# EAGLE board snarfbasev4b (EAGLE 6.4)
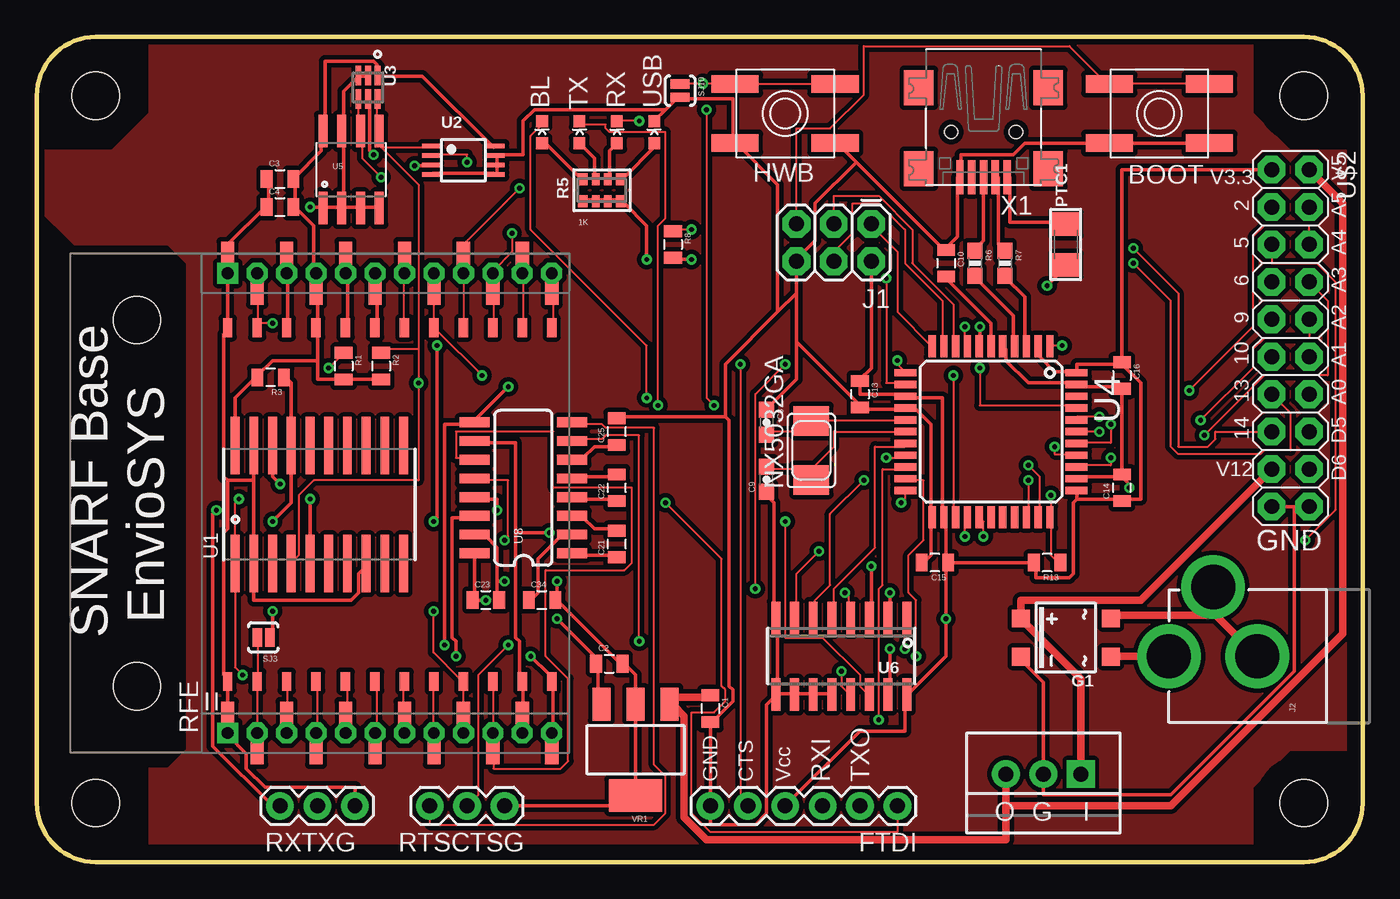
[diagram p0: board, top side]
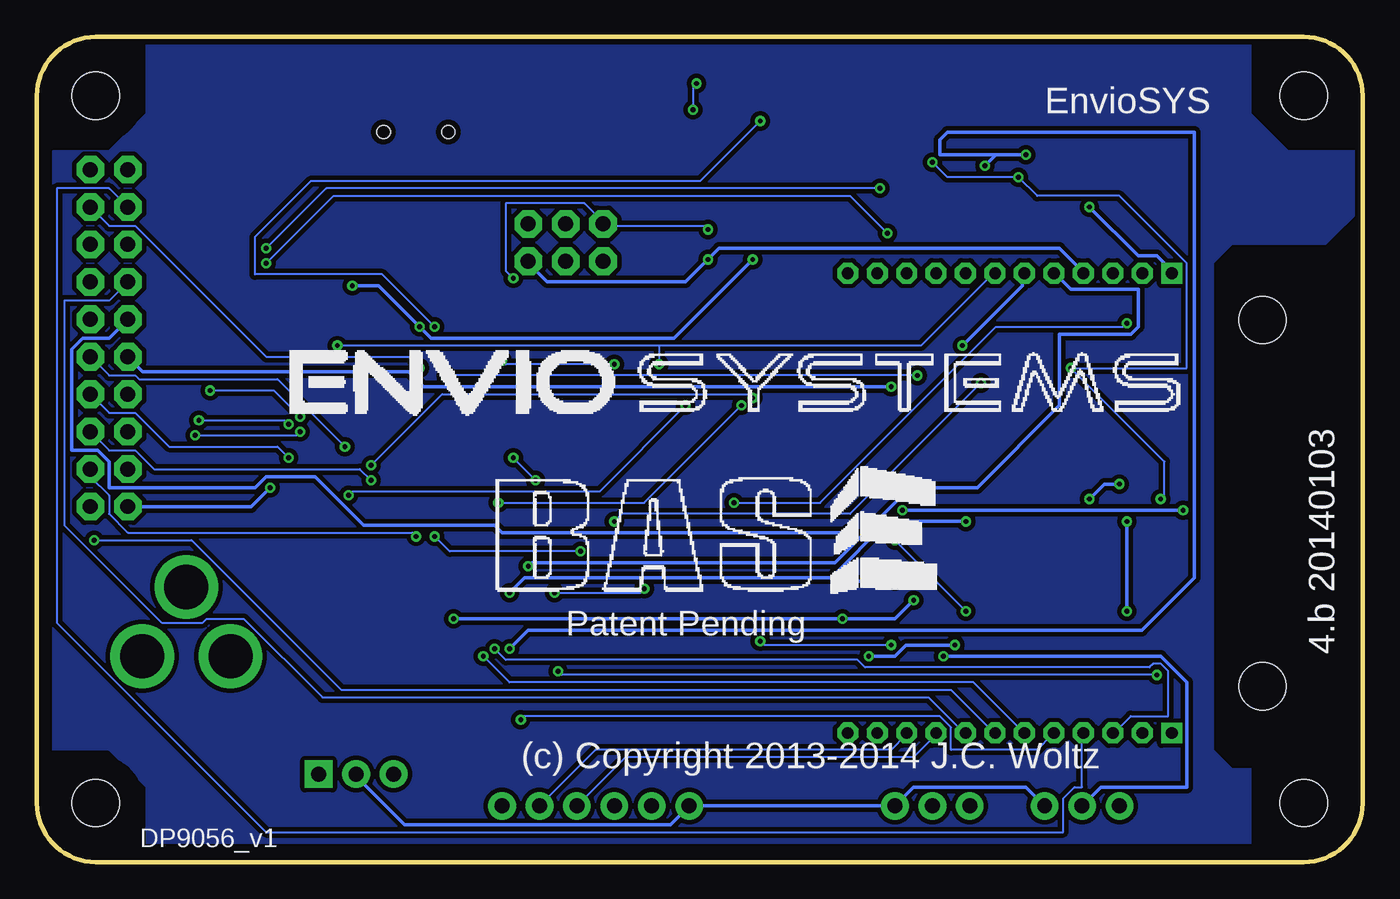
[diagram p1: board, bottom side, seen from below]

Size 90 x 56 mm. Coordinates in mm from the lower left corner, seen from the top.
Outline: 4,0 86,0 arc90 90,4 90,52 arc90 86,56 4,56 arc90 0,52 0,4 arc90 4,0
Copper layers (1*16): Top 0.0356mm / dielectric 1.5011mm / Bottom 0.0356mm
Design rules "LaenPCBOrder-JCModified": minimum track width 6mil, minimum drill 13mil, track to track 6mil, track to pad 6mil, pad to pad 6mil, via to via 6mil, smd to smd 6mil, copper to edge 15mil, drill to drill 6mil, minimum pad ring 12mil, minimum via ring 7mil, stop-mask expansion 4mil, vias tented up to drill 25mil, thermal gap 10mil
Net classes: 0 default: width 0.254 mm; 1 smallsignal: width 0.152 mm; 2 Power: width 0.508 mm; 3 medsignal: width 0.203 mm

## Footprints (pad centres in the part's own frame; a part is rotated, then mirrored left to right if it is on the bottom)
LED-0603 = smd 0.8 x 0.8: A 0,-0.75; C 0,0.75
EVQ-Q2 = smd 3.2 x 1.2: A -3.4,-2; A' 3.4,-2; B -3.4,2; B' 3.4,2
0805 = smd 0.8 x 1.2: 1 -0.9,0; 2 0.9,0
0603-CAP = smd 1.1 x 1: 1 -0.85,0; 2 0.85,0
1X06 = drill 1.016 pad 1.88: 1 0,0; 2 2.54,0; 3 5.08,0; 4 7.62,0; 5 10.16,0; 6 12.7,0
SOIC-4 = smd 1.2 x 1.2: + 1.3,3.05; - -1.3,3.05; ~1 -1.3,-3.05; ~2 1.3,-3.05
TO220-MURATA = drill 1 pad 1.88: GND 0,0; OUT 2.54,0 | drill 1 pad 1.88 square: IN -2.54,0
2X3 = drill 1.016 pad 1.88 octagon: 1 0,0; 2 0,2.54; 3 2.54,0; 4 2.54,2.54; 5 5.08,0; 6 5.08,2.54
POWER_JACK_PTH = drill 2.997 pad 4.318: GND 0,7.7; GNDBREAK 4.7,10.7; PWR 0,13.7
NX5032 = smd 2 x 2.4: P$1 2,0; P$2 -2,0
1206 = smd 1.6 x 1.8: 1 -1.4,0; 2 1.4,0
RESPACK_4X0603 = smd 0.65 x 0.8: 1 -1.3,-0.75; 4 1.3,-0.75; 5 1.3,0.75; 8 -1.3,0.75 | smd 0.5 x 0.8: 2 -0.4,-0.75; 3 0.4,-0.75; 6 0.4,0.75; 7 -0.4,0.75
0603-RES = smd 1.1 x 1: 1 -0.85,0; 2 0.85,0
SYNAPSERFENGINE-THM-SMT-JACK2 = drill 0.8 square: 1 0,0; 24 31.2,0 | drill 0.8 pad 1.422 octagon: 2 0,-2; 3 0,-4; 4 0,-6; 5 0,-8; 6 0,-10; 7 0,-12; 8 0,-14; 9 0,-16; 10 0,-18; 11 0,-20; 12 0,-22; 13 31.2,-22; 14 31.2,-20; 15 31.2,-18; 16 31.2,-16; 17 31.2,-14; 18 31.2,-12; 19 31.2,-10; 20 31.2,-8; 21 31.2,-6; 22 31.2,-4; 23 31.2,-2 | smd 1.67 x 0.89: P1 1.3,0; P2 -1.3,-2; P3 1.3,-4; P4 -1.3,-6; P5 1.3,-8; P6 -1.3,-10; P7 1.3,-12; P8 -1.3,-14; P9 1.3,-16; P10 -1.3,-18; P11 1.3,-20; P12 -1.3,-22; P13 29.9,-22; P14 32.5,-20; P15 29.9,-18; P16 32.5,-16; P17 29.9,-14; P18 32.5,-12; P19 29.9,-10; P20 32.5,-8; P21 29.9,-6; P22 32.5,-4; P23 29.9,-2; P24 32.5,0 | smd 1.27 x 0.635: P201 3.5,0; P202 3.5,-2; P203 3.5,-4; P204 3.5,-6; P205 3.5,-8; P206 3.5,-10; P207 3.5,-12; P208 3.5,-14; P209 3.5,-16; P210 3.5,-18; P211 3.5,-20; P212 3.5,-22; P213 27.5,-22; P214 27.5,-20; P215 27.5,-18; P216 27.5,-16; P217 27.5,-14; P218 27.5,-12; P219 27.5,-10; P220 27.5,-8; P221 27.5,-6; P222 27.5,-4; P223 27.5,-2; P224 27.5,0 | hole 3.2: 3.17,6.16; 28.03,6.16
1X03 = drill 1.016 pad 1.88: 1 0,0; 2 2.54,0; 3 5.08,0
SJ_2S-NOTRACE = smd 0.635 x 1.27: 1 -0.45,0; 2 0.4,0
SJ_2S-NO = smd 0.635 x 1.27: 1 -0.45,0; 2 0.45,0
SO20W = smd 0.6 x 3.9: P$1 -5.715,-4; P$2 -4.445,-4; P$3 -3.175,-4; P$4 -1.905,-4; P$5 -0.635,-4; P$6 0.635,-4; P$7 1.905,-4; P$8 3.175,-4; P$9 4.445,-4; P$10 5.715,-4; P$11 5.715,4; P$12 4.445,4; P$13 3.175,4; P$14 1.905,4; P$15 0.635,4; P$16 -0.635,4; P$17 -1.905,4; P$18 -3.175,4; P$19 -4.445,4; P$20 -5.715,4
TSSOP8 = smd 1.2 x 0.305: 1 -2.2,0.975; 2 -2.2,0.325; 3 -2.2,-0.325; 4 -2.2,-0.975; 5 2.2,-0.975; 6 2.2,-0.325; 7 2.2,0.325; 8 2.2,0.975
TSL2561_FN = smd 1.3 x 0.4: ADR -0.8,0; CLK 0.8,-0.65; DATA 0.8,0.65; INT 0.8,0; VDD -0.8,0.65; VSS -0.8,-0.65
TQFP44 = smd 1.5 x 0.5: 1 -5.8,4; 2 -5.8,3.2; 3 -5.8,2.4; 4 -5.8,1.6; 5 -5.8,0.8; 6 -5.8,0; 7 -5.8,-0.8; 8 -5.8,-1.6; 9 -5.8,-2.4; 10 -5.8,-3.2; 11 -5.8,-4; 23 5.8,-4; 24 5.8,-3.2; 25 5.8,-2.4; 26 5.8,-1.6; 27 5.8,-0.8; 28 5.8,0; 29 5.8,0.8; 30 5.8,1.6; 31 5.8,2.4; 32 5.8,3.2; 33 5.8,4 | smd 0.5 x 1.5: 12 -4,-5.8; 13 -3.2,-5.8; 14 -2.4,-5.8; 15 -1.6,-5.8; 16 -0.8,-5.8; 17 0,-5.8; 18 0.8,-5.8; 19 1.6,-5.8; 20 2.4,-5.8; 21 3.2,-5.8; 22 4,-5.8; 34 4,5.8; 35 3.2,5.8; 36 2.4,5.8; 37 1.6,5.8; 38 0.8,5.8; 39 0,5.8; 40 -0.8,5.8; 41 -1.6,5.8; 42 -2.4,5.8; 43 -3.2,5.8; 44 -4,5.8
SO08 = smd 0.61 x 2.21: 1 -1.905,-2.616; 2 -0.635,-2.616; 3 0.635,-2.616; 4 1.905,-2.616; 5 1.905,2.616; 6 0.635,2.616; 7 -0.635,2.616; 8 -1.905,2.616
SOIC16 = smd 0.6 x 2.2: 1 -4.445,-2.6; 2 -3.175,-2.6; 3 -1.905,-2.6; 4 -0.635,-2.6; 5 0.635,-2.6; 6 1.905,-2.6; 7 3.175,-2.6; 8 4.445,-2.6; 9 4.445,2.6; 10 3.175,2.6; 11 1.905,2.6; 12 0.635,2.6; 13 -0.635,2.6; 14 -1.905,2.6; 15 -3.175,2.6; 16 -4.445,2.6
SO016 = smd 0.66 x 2.032: 1 -4.445,-3.315; 2 -3.175,-3.315; 3 -1.905,-3.315; 4 -0.635,-3.315; 5 0.635,-3.315; 6 1.905,-3.315; 7 3.175,-3.315; 8 4.445,-3.315; 9 4.445,3.315; 10 3.175,3.315; 11 1.905,3.315; 12 0.635,3.315; 13 -0.635,3.315; 14 -1.905,3.315; 15 -3.175,3.315; 16 -4.445,3.315
2X10 = drill 1.016 pad 1.88 octagon: 1 -11.43,-1.27; 2 -11.43,1.27; 3 -8.89,-1.27; 4 -8.89,1.27; 5 -6.35,-1.27; 6 -6.35,1.27; 7 -3.81,-1.27; 8 -3.81,1.27; 9 -1.27,-1.27; 10 -1.27,1.27; 11 1.27,-1.27; 12 1.27,1.27; 13 3.81,-1.27; 14 3.81,1.27; 15 6.35,-1.27; 16 6.35,1.27; 17 8.89,-1.27; 18 8.89,1.27; 19 11.43,-1.27; 20 11.43,1.27
DP9056_V1 = hole 3.2: 4,4; 86,4; 86,52; 4,52
SOT223 = smd 1.219 x 2.235: 1 -2.311,-3.099; 2 0,-3.099; 3 2.311,-3.099 | smd 3.6 x 2.2: 4 0,3.099
USB-MINIB = smd 0.5 x 2.308: D+ 0,4.064; D- -0.8,4.064; GND 1.6,4.064; ID 0.8,4.064; VBUS -1.6,4.064 | smd 2 x 2.4: GND1 -4.4,-2; GND2 -4.4,3.5; GND3 4.4,3.5; GND4 4.4,-2 | hole 0.9: -2.2,1; 2.2,1

## Placement (x,y rotation side)
BL  RED  [LED-0603]  34.29,49.53 0 top
BOOT  EVQQ2  [EVQ-Q2]  76.2,50.8 180 top
C1  1uF  [0805]  45.72,10.41 270 top
C2  1uF  [0805]  38.86,13.46 0 top
C3  1uF  [0805]  16.51,46.35 0 top
C4  10uF  [0805]  16.51,44.45 0 top
C8  12pF  [0603-CAP]  49.53,29.84 270 top
C9  12pF  [0603-CAP]  49.53,25.97 90 top
C10  1uF  [0805]  61.72,40.64 270 top
C13  1uF  [0805]  55.88,31.75 270 top
C14  1uF  [0805]  73.66,25.4 90 top
C15  1uF  [0805]  60.96,20.32 180 top
C16  1uF  [0805]  73.66,33.02 270 top
C21  0.1uF  [0805]  39.37,21.59 90 top
C22  0.1uF  [0805]  39.37,25.4 90 top
C23  0.1uF  [0805]  30.48,17.78 0 top
C25  0.1uF  [0805]  39.37,29.21 90 top
C34  0.1uF  [0805]  34.29,17.78 0 top
FTDI  [1X06]  58.42,3.81 180 top
G1  [SOIC-4]  69.85,15.24 90 top
HWB  EVQQ2  [EVQ-Q2]  50.8,50.8 180 top
IC1  [TO220-MURATA]  68.33,5.97 180 top
J1  AVR_SPI_PRG_6PTH  [2X3]  56.64,43.31 180 top
J2  POWER_JACKPTH  [POWER_JACK_PTH]  90.55,13.97 90 top
NX5032GA  8MHz  [NX5032]  52.58,27.94 90 top
PTC1  [1206]  69.85,41.91 90 top
R1  [0805]  20.83,33.66 270 top
R2  [0805]  23.37,33.66 270 top
R3  10k  [0805]  15.88,32.89 180 top
R5  1K  [RESPACK_4X0603]  38.35,45.59 0 top
R6  22  [0603-RES]  63.68,40.64 270 top
R7  22  [0603-RES]  65.71,40.64 270 top
R8  10K  [0805]  43.18,41.91 270 top
R13  10K  [0805]  68.58,20.32 180 top
RFE  RFE  [SYNAPSERFENGINE-THM-SMT-JACK2]  12.95,8.76 90 top
RTSCTSG  [1X03]  31.75,3.81 180 top
RX  yellow  [LED-0603]  39.37,49.53 0 top
RXTXG  RX TX G  [1X03]  21.59,3.81 180 top
SJ3  SOLDERJUMPERNC2  [SJ_2S-NOTRACE]  15.37,15.24 180 top
SJ10  HWB  [SJ_2S-NO]  43.66,52.35 270 top
TX  yellow  [LED-0603]  36.83,49.53 0 top
U1  PCF2129ASO20  [SO20W]  19.18,24.26 0 top
U2  lm75adp  [TSSOP8]  28.96,47.62 0 top
U3  TSL2561_DFN  [TSL2561_FN]  22.48,52.58 270 top
U4  ATMEGA32U4-AU  [TQFP44]  64.77,29.21 270 top
U5  24LC256T-I/SN  [SO08]  21.34,46.99 0 top
U6  PCA9541SO16-2  [SOIC16]  54.61,13.97 180 top
U8  MAX3232EIDWR  [SO016]  33.02,25.4 90 top
U$1  [ENVIOSYS_LOGO2]  44.45,27.94 0 bottom
U$2  M10X2  [2X10]  85.09,35.56 270 top
U$3  [DP9056_V1]  0,0 0 top
USB  GREEN  [LED-0603]  41.91,49.53 0 top
VR1  MCP1826S  [SOT223]  40.64,7.62 180 top
X1  USBSMD  [USB-MINIB]  64.26,50.55 180 top

## Library data of the parts
BL C1-C4 C10 C13-C16 C21-C23 C25 C34 R6 R7 RFE RX TX U1 USB X1 = 0_jc-custom
BOOT HWB = adaprog
C8 C9 FTDI J1 R3 RTSCTSG RXTXG SJ3 SJ10 U5 U8 = SparkFun
G1 PTC1 R5 U2 U3 = microbuilder
IC1 U6 U$1 = 0_jc-custom-eagle6
J2 = SparkFun-Connectors; PROD_ID: PRT-00119
NX5032GA U4 = adafruit
R1 R2 R8 R13 = SparkFun-Resistors
U$2 = SparkFun-Connectors
U$3 = dp_pcb
VR1 = SparkFun-PowerIC

## Nets
!TLINT: U2.3 U3.INT U6.15
AREF-7: U4.42
ARXLED [smallsignal]: RX.C U4.8
ATXLED [smallsignal]: TX.C U4.22
CTS1 [smallsignal]: RTSCTSG.2 U8.7
GND: BOOT.B BOOT.B' C1.2 C2.2 C3.1 C4.1 C8.1 C9.1 C10.1 C13.2 C14.2 C15.2 C16.2 C23.2 C25.2 C34.2 FTDI.6 G1.- HWB.B HWB.B' IC1.GND J1.6 RFE.1 RFE.24 RFE.P1 RFE.P24 RFE.P201 RFE.P224 RTSCTSG.1 RXTXG.1 SJ10.2 U1.P$2 U1.P$8 U1.P$19 U2.4 U2.5 U2.6 U2.7 U3.ADR U3.VSS U4.5 U4.15 U4.23 U4.35 U4.43 U5.1 U5.2 U5.3 U5.4 U5.7 U6.8 U6.9 U6.10 U6.11 U6.12 U8.15 U$2.19 U$2.20 USB.C VR1.2 VR1.4 X1.GND
GPIO0_RTCINT [smallsignal]: RFE.2 RFE.P2 RFE.P202 SJ3.2
GPIO1_I2CINT [smallsignal]: RFE.3 RFE.P3 RFE.P203 U6.1
GPIO2_PINHD [smallsignal]: RFE.4 RFE.P4 RFE.P204 U$2.3
GPIO5_PINHD [smallsignal]: RFE.7 RFE.P7 RFE.P207 U$2.5
GPIO6_PINHD [smallsignal]: RFE.8 RFE.P8 RFE.P208 U$2.7
GPIO9_PINHD: RFE.11 RFE.P11 RFE.P211 U8.10 U$2.9
GPIO10_PINHD: RFE.12 RFE.P12 RFE.P212 U8.9 U$2.11
GPIO11 [smallsignal]: RFE.13 RFE.P13 RFE.P213
GPIO12 [smallsignal]: RFE.14 RFE.P14 RFE.P214
GPIO13_PINHD [smallsignal]: RFE.15 RFE.P15 RFE.P215 U$2.13
GPIO14_PINHD [smallsignal]: RFE.16 RFE.P16 RFE.P216 U$2.15
GPIO19: RFE.22 RFE.P22 RFE.P222
HWB [smallsignal]: HWB.A HWB.A' R13.1 SJ10.1 U4.33
IFS: U1.P$5 U1.P$18
MISO [smallsignal]: J1.1 U4.11
MOSI [smallsignal]: J1.4 U4.10
N$3 [Power]: G1.~1 J2.PWR
N$4: C10.2 U4.6
N$5: BL.A R5.8
N$7 [Power]: G1.~2 J2.GND J2.GNDBREAK
N$8: R5.7 TX.A
N$9: R5.6 RX.A
N$10: R5.5 USB.A
N$13: C21.2 U8.3
N$14: C22.2 U8.5
N$15: C34.1 U8.2
N$16: C25.1 U8.6
N$17: C21.1 U8.1
N$18: C22.1 U8.4
PB4-D8 [smallsignal]: U4.28
PB5-D9 [smallsignal]: U4.29
PB6-D10 [smallsignal]: U4.30
PB7-D11-I2CRST [smallsignal]: U4.12 U6.4
PC6-D5 [smallsignal]: U4.31 U$2.16
PC7-D13-LEDBL [smallsignal]: BL.C U4.32
PD4-D4-GPIO15 [smallsignal]: RFE.17 RFE.P17 RFE.P217 U4.25
PD6-D12-I2C [smallsignal]: U4.26 U6.7
PD7-D6 [smallsignal]: U4.27 U$2.18
PE6-D7-GPIO16 [smallsignal]: FTDI.5 RFE.18 RFE.P18 RFE.P218 U4.1
PF0-A5 [smallsignal]: U4.41 U$2.4
PF1-A4 [smallsignal]: U4.40 U$2.6
PF4-A3 [smallsignal]: U4.39 U$2.8
PF5-A2 [smallsignal]: U4.38 U$2.10
PF6-A1 [smallsignal]: U4.37 U$2.12
PF7-A0 [smallsignal]: U4.36 U$2.14
R6: R3.1 SJ3.1 U1.P$17
RESET_L [smallsignal]: FTDI.1 RFE.23 RFE.P23 RFE.P223
RST [smallsignal]: BOOT.A BOOT.A' J1.5 R8.1 U4.13
RTS1 [smallsignal]: RTSCTSG.3 U8.8
RX0: RXTXG.3 U8.13
RX1 [smallsignal]: RFE.6 RFE.P6 RFE.P206 U4.21
RXI [smallsignal]: FTDI.3 RFE.9 RFE.P9 RFE.P209 U8.12
SCK [smallsignal]: J1.3 U4.9
SCL0: RFE.20 RFE.P20 RFE.P220 U6.3
SCL1 [smallsignal]: U4.18 U6.5
SCL3 [smallsignal]: R1.1 U1.P$1 U2.2 U3.CLK U5.6 U6.13
SDA0: RFE.19 RFE.P19 RFE.P219 U6.2
SDA1 [smallsignal]: U4.19 U6.6
SDA3 [smallsignal]: R2.1 U1.P$4 U2.1 U3.DATA U5.5 U6.14
TX0: RXTXG.2 U8.14
TX1 [smallsignal]: RFE.5 RFE.P5 RFE.P205 U4.20
TXO [smallsignal]: FTDI.2 RFE.10 RFE.P10 RFE.P210 U8.11
UD_N: R7.2 U4.3
UD_P: R6.2 U4.4
UDM_N: R7.1 X1.D-
UDM_P: R6.1 X1.D+
VBUS: PTC1.1 R5.1 R5.2 R5.3 R5.4 U4.7
VBUSRAW: PTC1.2 X1.VBUS
VCC3: C2.1 C3.2 C4.2 C13.1 C14.1 C15.1 C16.1 C23.1 FTDI.4 J1.2 R1.2 R2.2 R3.2 R8.2 R13.2 RFE.21 RFE.P21 RFE.P221 U1.P$20 U2.8 U3.VDD U4.2 U4.14 U4.24 U4.34 U4.44 U5.8 U6.16 U8.16 U$2.1 VR1.3
VCC5 [Power]: C1.1 IC1.OUT U$2.2 VR1.1
VCC12 [Power]: G1.+ IC1.IN U$2.17
XTAL_N [smallsignal]: C9.2 NX5032GA.P$2 U4.17
XTAL_P [smallsignal]: C8.2 NX5032GA.P$1 U4.16

## Tracks (layer width: path | path; a pad name or v marks a point on that pad's centre or on a via)
!TLINT  (via drill 0.33)
  Top 0.254: v25.65,47.24 26.67,47.24 U2.3 | v22.86,48.01 22.61,48.26 22.61,51.56 U3.INT | v57.91,14.48 57.91,11.43 U6.15
  Bottom 0.254: 24.89,48.01 v25.65,47.24 | v22.86,48.01 24.89,48.01 | v57.91,14.48 56.64,15.75 14.99,15.75 11.43,19.3 11.43,49.53 28.19,49.53 28.7,49.02 28.7,48.01 24.89,48.01
ARXLED  (via drill 0.33)
  Top 0.152: v40.89,50.29 39.37,50.29 RX.C | v62.99,36.32 62.99,35.05 U4.8
  Bottom 0.152: v40.89,50.29 44.96,46.23 71.37,46.23 75.18,42.42 75.18,39.88 66.55,39.88 v62.99,36.32
ATXLED  (via drill 0.33)
  Top 0.152: v42.16,30.99 42.16,43.18 42.67,43.69 42.67,49.53 38.86,49.53 38.61,49.78 38.61,50.04 36.83,50.04 TX.C | v58.67,24.38 58.93,24.64 58.93,25.15 U4.22
  Bottom 0.152: v42.16,30.99 48.77,24.38 v58.67,24.38
CTS1  (via drill 0.33)
  Top 0.152: v40.89,14.99 40.89,28.96 38.61,28.96 38.35,28.7 36.58,28.7 U8.7 | v32,14.73 29.97,12.7 29.97,4.57 RTSCTSG.2
  Bottom 0.152: v40.89,14.99 40.64,14.73 v32,14.73
GND  (via drill 0.33)
  Top 0.254: BOOT.B 79.5,48.77 72.9,48.77 BOOT.B' 72.64,48.77 67.06,48.77 66.29,48.01 62.74,48.01 62.74,46.48 X1.GND 62.48,46.48 62.48,42.42 61.72,41.66 C10.1 61.72,41.4 55.63,47.5 | 55.63,47.5 54.36,48.77 HWB.B | U2.4 26.92,46.74 30.99,46.74 U2.5 31.24,46.74 31.24,47.24 | 31.24,47.24 U2.6 31.24,47.24 | 31.24,47.24 31.24,48.01 | 31.24,48.01 U2.7 31.24,48.01 | 42.67,51.05 43.43,51.82 SJ10.2 43.69,51.82 47.24,51.82 47.24,49.02 HWB.B' 47.5,48.77 50.29,45.97 50.29,37.34 | 42.67,51.05 41.91,50.29 USB.C | 31.24,48.01 33.02,48.01 33.02,50.29 33.78,51.05 42.67,51.05 | C15.2 60.2,20.32 60.71,20.83 60.71,23.37 U4.23 60.71,23.62 60.71,29.72 59.69,30.73 59.18,30.73 U4.15 58.93,30.73 55.88,30.73 C13.2 55.88,30.99 51.56,35.31 | 51.56,38.61 51.56,40.64 J1.6 51.56,40.89 52.83,42.16 52.83,44.7 55.63,47.5 | 51.56,38.61 51.56,35.31 | 51.56,35.31 51.56,32.77 49.53,30.73 C8.1 | 46.74,30.23 39.37,30.23 C25.2 | 46.74,30.23 46.74,33.78 50.29,37.34 | 51.56,38.61 50.29,37.34 | 73.66,26.16 70.61,26.16 U4.35 | 73.66,26.16 C14.2 | U4.5 65.79,34.8 65.79,34.04 67.31,32.51 70.36,32.51 U4.43 70.61,32.26 73.66,32.26 C16.2 73.66,32 73.66,26.42 C14.2 | U$2.20 85.34,24.13 | 85.34,24.13 U$2.19 | G1.- 66.8,13.72 68.33,12.19 68.33,6.1 IC1.GND 68.33,5.84 68.33,4.57 76.96,4.57 85.34,12.95 85.34,24.13 | 73.66,26.16 74.17,25.65 v74.17,25.4 | 73.66,26.16 C14.2 | U5.2 20.57,44.45 19.56,44.45 U5.1 19.3,44.45 v18.54,44.45 | U5.4 23.11,44.45 22.1,44.45 U5.3 21.84,44.45 20.83,44.45 | 20.83,44.45 U5.2 | 21.84,53.34 22.35,53.34 U3.ADR | 21.84,53.34 U3.VSS 21.84,53.34 | 21.84,53.34 20.83,52.32 20.83,49.78 U5.7 20.83,49.53 20.83,44.45
  Top 0.254: 20.83,44.45 U5.2 | C3.1 15.75,46.23 15.75,44.45 C4.1 15.49,44.45 12.95,41.91 12.95,41.4 RFE.P24 12.95,41.15 12.95,40.13 RFE.24 12.95,39.88 12.95,36.32 RFE.P224 12.95,36.07 12.7,35.81 12.7,26.16 12.95,25.91 | 14.73,25.91 14.73,28.19 U1.P$19 | 14.73,25.91 14.73,20.32 U1.P$2 14.73,20.07 14.73,17.78 21.34,17.78 21.84,18.29 21.84,19.56 22.35,20.07 U1.P$8 | 14.73,25.91 12.95,25.91 | RXTXG.1 21.59,5.08 15.49,5.08 14.22,6.35 14.22,7.37 12.95,8.64 RFE.1 12.95,8.89 12.95,9.91 RFE.P1 12.95,10.16 12.95,12.19 RFE.P201 12.95,12.45 12.7,12.7 12.7,22.35 12.95,22.61 12.95,25.91 | 50.29,11.43 51.31,11.43 U6.10 51.56,11.43 52.58,11.43 U6.11 52.83,11.43 53.85,11.43 U6.12 | 50.29,11.43 U6.9 | C9.1 49.53,24.89 50.04,24.38 50.04,16.76 U6.8 50.29,16.51 50.29,11.43 | 50.29,11.43 U6.9 | 45.72,9.4 FTDI.6 45.72,2.54 48.77,2.54 49.53,3.3 49.53,10.67 50.04,11.18 U6.9 | 45.72,9.4 C1.2 45.72,9.4 | 31.24,19.05 31.24,21.34 30.48,22.1 29.72,22.1 U8.15 | 31.24,19.05 31.24,17.78 C23.2 | 35.31,17.78 39.62,13.46 C2.2 39.88,13.46 40.64,12.7 40.64,10.92 VR1.2 40.64,10.67 40.64,4.57 VR1.4 40.64,4.32 40.64,3.81 RTSCTSG.1 | 35.31,17.78 C34.2 35.31,17.78 | v31.75,19.05 31.24,19.05 | 35.31,17.78 v35.31,19.05 | 46.74,30.23 46.99,29.97 46.99,11.94 47.24,11.68 47.24,10.92 45.72,9.4
  Bottom 0.254: v74.17,25.4 75.44,24.13 U$2.19 | v18.54,44.45 15.24,41.15 13.97,41.15 12.95,40.13 RFE.24 | v35.31,19.05 v31.75,19.05 | RXTXG.1 22.86,5.08 30.48,5.08 RTSCTSG.1 FTDI.6 46.99,2.54 65.02,2.54 68.33,5.84 IC1.GND
GPIO0_RTCINT
  Top 0.152: SJ3.2 14.99,15.24 14.99,12.45 RFE.P202 14.99,12.19 14.99,8.89 RFE.2 14.99,8.64 14.99,7.62 RFE.P2
GPIO1_I2CINT  (via drill 0.33)
  Top 0.152: RFE.P203 17.02,12.19 17.02,10.16 RFE.P3 17.02,9.91 17.02,8.89 RFE.3 | v58.93,14.48 58.93,16.51 U6.1
  Bottom 0.152: v58.93,14.48 58.17,13.72 34.29,13.72 33.78,13.21 14.48,13.21 14.22,13.46 13.72,13.46 13.21,12.95 13.21,9.91 15.75,9.91 16.76,8.89 RFE.3
GPIO2_PINHD
  Top 0.152: RFE.P204 19.05,12.19 19.05,8.89 RFE.4 19.05,8.64 19.05,7.62 RFE.P4
  Bottom 0.152: U$2.3 85.09,45.72 88.65,45.72 88.65,16.26 74.42,2.03 20.32,2.03 20.32,4.32 19.56,5.08 19.05,5.08 19.05,8.64 RFE.4
GPIO5_PINHD  (via drill 0.33)
  Top 0.152: RFE.P207 24.89,12.19 24.89,10.16 RFE.P7 24.89,9.91 24.89,8.89 RFE.7 | v86.11,21.84 88.14,23.88 88.14,39.37 86.87,40.64 83.82,40.64 U$2.5
  Bottom 0.152: v86.11,21.84 79.5,21.84 69.34,11.68 27.94,11.68 25.15,8.89 RFE.7
GPIO6_PINHD
  Top 0.152: RFE.P208 26.92,12.19 26.92,8.89 RFE.8 26.92,8.64 26.92,7.62 RFE.P8
  Bottom 0.152: U$2.7 85.09,38.1 88.14,38.1 88.14,22.86 81.53,16.26 78.74,16.26 78.49,16.51 75.95,16.51 70.61,11.18 29.46,11.18 27.18,8.89 RFE.8
GPIO9_PINHD  (via drill 0.33)
  Top 0.254: 32.51,22.35 32.51,15.24 32.77,14.99 32.77,12.45 RFE.P211 33.02,12.19 33.02,10.16 RFE.P11 33.02,9.91 33.02,8.89 RFE.11 | 32.51,22.35 32.51,28.45 29.72,28.45 U8.10 | 32.51,22.35 v34.8,22.35
  Bottom 0.254: U$2.9 85.09,35.56 86.87,35.56 87.63,34.8 87.63,27.94 85.85,27.94 85.09,27.18 85.09,25.4 75.18,25.4 74.42,26.16 71.12,26.16 67.82,22.86 58.93,22.86 58.42,22.35 v34.8,22.35
GPIO10_PINHD  (via drill 0.33)
  Top 0.254: RFE.P12 35.05,7.62 35.05,8.64 RFE.12 35.05,8.89 35.05,12.19 RFE.P212 34.8,12.45 34.8,12.7 v33.53,13.97 | v27.69,14.73 27.69,29.72 29.46,29.72 U8.9 29.72,29.97 v32,32.26
  Bottom 0.254: v27.69,14.73 30.99,14.73 31.75,13.97 v33.53,13.97 | U$2.11 82.8,33.27 64.77,33.27 63.75,32.26 v32,32.26
GPIO11
  Top 0.152: RFE.P213 35.05,36.32 35.05,38.61 RFE.P13 35.05,38.86 35.05,39.88 RFE.13
GPIO12
  Top 0.152: RFE.P214 33.02,36.32 33.02,39.88 RFE.14 33.02,40.13 33.02,41.15 RFE.P14
GPIO13_PINHD  (via drill 0.33)
  Top 0.152: RFE.P215 30.99,36.32 30.99,38.61 RFE.P15 30.99,38.86 30.99,39.88 RFE.15 30.99,40.13 32.26,41.4 v32.26,42.67 | v74.42,40.64 76.96,38.1 76.96,28.19 77.47,27.69 83.06,27.69 83.31,27.94 85.09,27.94 85.09,30.48 U$2.13
  Bottom 0.152: v32.26,42.67 34.8,45.21 69.85,45.21 v74.42,40.64
GPIO14_PINHD  (via drill 0.33)
  Top 0.152: RFE.P216 28.96,36.32 28.96,39.88 RFE.16 28.96,40.13 28.96,41.15 RFE.P16 28.96,41.4 28.96,41.91 v32.77,45.72 | U$2.15 80.01,29.21 80.01,28.7 79.5,28.19 77.47,28.19 77.47,38.61 v74.42,41.66
  Bottom 0.152: v74.42,41.66 70.36,45.72 v32.77,45.72
GPIO19
  Top 0.254: RFE.P222 17.02,36.32 17.02,39.88 RFE.22 17.02,40.13 17.02,41.15 RFE.P22
HWB  (via drill 0.33)
  Top 0.152: R13.1 69.34,20.32 68.83,20.83 68.83,23.37 U4.33 68.83,23.62 v68.83,24.89 | SJ10.1 43.69,52.83 v45.21,52.83 47.24,52.83 HWB.A' 47.5,52.83 54.1,52.83 HWB.A | v45.97,30.99 45.47,31.5 v45.47,51.05
  Bottom 0.152: v68.83,24.89 68.58,25.15 51.82,25.15 v45.97,30.99 | v45.47,51.05 45.47,52.83 v45.21,52.83
IFS  (via drill 0.33)
  Top 0.254: v18.54,24.64 18.54,20.32 U1.P$5 | v16.51,25.65 16,26.16 16,28.19 U1.P$18
  Bottom 0.254: v18.54,24.64 17.53,25.65 v16.51,25.65
MISO
  Top 0.152: U4.11 60.71,35.05 58.42,37.34 58.42,41.4 56.64,43.18 J1.1
MOSI
  Top 0.152: U4.10 61.47,35.05 61.47,38.1 58.93,40.64 58.93,42.93 57.15,44.7 55.37,44.7 55.37,42.67 54.1,41.4 54.1,40.89 J1.4
N$2
  pour Top (isolate 0.305): 7.62,55.88 7.62,50.8 5.08,48.26 0,48.26 0,44.45 2.54,41.91 8.89,41.91 10.16,40.64 10.16,7.62 8.89,6.35 7.62,6.35 7.62,1.27 82.55,1.27 82.55,5.08 85.09,7.62 88.9,7.62 88.9,48.26 85.09,48.26 82.55,50.8 82.55,55.88
N$3
  Top 0.508: G1.~1 73.15,13.97 76.71,13.97 J2.PWR
N$4
  Top 0.254: C10.2 61.72,39.62 64.77,36.58 64.77,35.05 U4.6
N$5
  Top 0.254: R5.8 36.83,46.48 34.29,49.02 BL.A
N$7
  Top 0.508: 79.76,17.02 79.76,18.54 J2.GNDBREAK 79.76,17.02 | 79.76,17.02 79.76,16.76 73.15,16.76 G1.~2 | 79.76,17.02 82.8,13.97 J2.GND
N$8
  Top 0.254: R5.7 37.85,46.48 37.85,47.75 36.83,48.77 TX.A
N$9
  Top 0.254: R5.6 38.86,46.48 38.86,48.26 39.37,48.77 RX.A
N$10
  Top 0.254: R5.5 39.88,46.48 41.91,48.51 41.91,48.77 USB.A
N$12
  pour Bottom (isolate 0.305): 7.62,55.88 7.62,50.8 5.08,48.26 0,48.26 0,44.45 2.54,41.91 8.89,41.91 10.16,40.64 10.16,7.62 8.89,6.35 7.62,6.35 7.62,1.27 82.55,1.27 82.55,5.08 85.09,7.62 88.9,7.62 88.9,48.26 85.09,48.26 82.55,50.8 82.55,55.88
N$13
  Top 0.254: C21.2 39.37,22.61 37.85,22.61 37.08,23.37 36.58,23.37 U8.3
N$14
  Top 0.254: C22.2 39.37,26.16 36.58,26.16 U8.5
N$15
  Top 0.254: C34.1 33.53,17.78 34.04,18.29 34.04,20.57 35.56,22.1 36.32,22.1 U8.2
N$16
  Top 0.254: C25.1 39.37,28.19 37.85,28.19 37.08,27.43 36.58,27.43 U8.6
N$17
  Top 0.254: C21.1 39.37,20.83 36.58,20.83 U8.1
N$18
  Top 0.254: C22.1 39.37,24.64 36.58,24.64 U8.4
PB7-D11-I2CRST  (via drill 0.33)
  Top 0.152: v58.42,34.04 58.42,33.78 58.93,33.27 U4.12 | v50.8,33.78 48.77,31.75 v48.77,18.54 | v54.86,18.29 55.12,18.03 55.12,16.76 U6.4
  Bottom 0.152: v58.42,34.04 58.17,33.78 v50.8,33.78 | v48.77,18.54 49.02,18.29 v54.86,18.29
PC6-D5  (via drill 0.33)
  Top 0.152: v67.31,25.91 67.31,23.62 U4.31
  Bottom 0.152: v67.31,25.91 68.07,26.67 82.04,26.67 83.31,27.94 85.09,27.94 U$2.16
PC7-D13-LEDBL  (via drill 0.33)
  Top 0.152: v41.4,31.5 41.4,35.05 33.53,42.93 33.53,49.28 34.29,50.04 BL.C | v67.31,26.92 68.07,26.16 68.07,23.62 U4.32
  Bottom 0.152: v41.4,31.5 41.66,31.75 62.48,31.75 v67.31,26.92
PD4-D4-GPIO15  (via drill 0.33)
  Top 0.152: v62.23,33.02 62.23,23.62 U4.25 | v30.23,33.02 27.18,36.07 RFE.P217 26.92,36.32 26.92,38.61 RFE.P17 26.92,38.86 26.92,39.88 RFE.17
  Bottom 0.152: v30.23,33.02 v62.23,33.02
PD6-D12-I2C  (via drill 0.33)
  Top 0.152: v62.99,22.1 62.99,23.37 U4.26 | v53.09,21.08 51.56,19.56 51.56,16.76 U6.7
  Bottom 0.152: v62.99,22.1 61.98,21.08 v53.09,21.08
PD7-D6  (via drill 0.33)
  Top 0.152: v64.26,22.1 64.26,23.11 64.01,23.37 U4.27
  Bottom 0.152: v64.26,22.1 64.52,22.35 83.82,22.35 85.09,23.62 85.09,24.89 86.36,26.16 U$2.18
PE6-D7-GPIO16  (via drill 0.33)
  Top 0.152: RFE.P218 24.89,36.32 24.89,39.88 RFE.18 24.89,40.13 24.89,41.15 RFE.P18 | v69.6,35.05 68.83,35.05 U4.1 | FTDI.5 47.75,4.32 v47.75,33.78
  Bottom 0.152: 47.75,35.05 29.97,35.05 25.15,39.88 RFE.18 | 47.75,35.05 v69.6,35.05 | 47.75,35.05 v47.75,33.78
PF0-A5  (via drill 0.33)
  Top 0.152: v64.01,33.53 64.01,30.99 70.36,30.99 U4.41
  Bottom 0.152: v64.01,33.53 64.77,34.29 74.42,34.29 83.31,43.18 85.09,43.18 U$2.4
PF1-A4  (via drill 0.33)
  Top 0.152: v72.14,30.23 70.61,30.23 U4.40 | v78.23,32 82.55,36.32 82.55,42.42 83.31,43.18 86.36,43.18 U$2.6
  Bottom 0.152: v72.14,30.23 73.91,32 v78.23,32
PF4-A3  (via drill 0.33)
  Top 0.152: v72.14,29.21 70.61,29.21 U4.39 | v79.25,28.96 83.31,33.02 87.63,33.02 87.63,38.1 U$2.8
  Bottom 0.152: v72.14,29.21 72.39,28.96 v79.25,28.96
PF5-A2  (via drill 0.33)
  Top 0.152: v72.9,29.72 72.9,28.45 70.61,28.45 U4.38 | v78.99,29.97 82.55,33.53 82.55,34.8 83.31,35.56 86.36,35.56 U$2.10
  Bottom 0.152: v72.9,29.72 73.15,29.97 v78.99,29.97
PF6-A1  (via drill 0.33)
  Top 0.152: v69.09,28.19 69.09,27.69 70.36,27.69 U4.37
  Bottom 0.152: v69.09,28.19 73.66,32.77 83.06,32.77 83.31,33.02 85.09,33.02 U$2.12
PF7-A0  (via drill 0.33)
  Top 0.152: v72.9,27.43 72.9,26.92 70.61,26.92 U4.36
  Bottom 0.152: v72.9,27.43 73.66,28.19 81.03,28.19 83.31,30.48 85.09,30.48 U$2.14
R6  (via drill 0.33)
  Top 0.254: R3.1 17.02,32.77 17.27,32.51 17.27,28.45 U1.P$17 17.27,28.19 17.27,24.38 v16,23.11 | v16,17.02 16,15.24 SJ3.1
  Bottom 0.254: v16,23.11 v16,17.02
RESET_L  (via drill 0.33)
  Top 0.152: 14.99,36.58 14.99,38.61 RFE.P23 14.99,38.86 14.99,39.88 RFE.23 | 14.99,36.58 14.99,36.32 RFE.P223 14.99,36.58 | v16,36.58 14.99,36.58 | v42.67,24.38 46.48,20.57 46.48,11.94 46.74,11.68 46.74,10.92 45.97,10.16 44.45,10.16 44.45,3.3 45.72,2.03 58.42,2.03 FTDI.1
  Bottom 0.152: v16,36.58 16.26,36.32 24.89,36.32 36.83,24.38 v42.67,24.38
RST  (via drill 0.33)
  Top 0.152: BOOT.A 79.5,52.83 72.9,52.83 BOOT.A' 72.64,52.83 70.1,55.37 56.13,55.37 56.13,52.07 53.85,49.78 51.56,49.78 51.56,43.43 J1.5 | v44.45,42.93 43.18,42.93 R8.1 | v57.66,39.62 57.66,32.51 58.93,32.51 U4.13
  Bottom 0.152: v44.45,42.93 44.7,43.18 51.56,43.18 J1.5 51.56,43.43 52.83,44.7 58.17,44.7 58.17,40.13 v57.66,39.62
RTS1
  Top 0.152: RTSCTSG.3 26.67,2.54 41.91,2.54 42.67,3.3 42.67,5.84 41.91,6.6 41.91,29.46 38.61,29.46 38.35,29.72 36.58,29.72 U8.8
RX0  (via drill 0.33)
  Top 0.254: v31.24,23.88 31.24,24.64 29.72,24.64 U8.13 | v12.19,23.88 11.94,23.62 11.94,7.87 16,3.81 RXTXG.3
  Bottom 0.254: v12.19,23.88 v31.24,23.88
RX1  (via drill 0.33)
  Top 0.152: RFE.P206 23.11,12.19 23.11,8.89 RFE.6 23.11,8.64 23.11,7.62 RFE.P6 | v59.69,13.97 59.69,17.78 59.18,18.29 59.18,20.83 60.2,21.84 60.2,25.91 59.18,25.91 U4.21
  Bottom 0.152: v59.69,13.97 57.91,12.19 26.42,12.19 23.11,8.89 RFE.6
RXI  (via drill 0.33)
  Top 0.152: v31.75,21.84 32,22.1 32,25.91 29.72,25.91 U8.12 | v26.92,17.02 26.92,14.22 28.7,12.45 RFE.P209 28.96,12.19 28.96,10.16 RFE.P9 28.96,9.91 28.96,8.89 RFE.9
  Bottom 0.152: v26.92,17.02 v31.75,21.84 | FTDI.3 50.04,7.11 30.48,7.11 28.96,8.64 RFE.9
SCK
  Top 0.152: U4.9 62.23,35.05 62.23,37.85 59.44,40.64 59.44,42.93 57.15,45.21 54.1,45.21 54.1,43.43 J1.3
SCL0  (via drill 0.33)
  Top 0.254: RFE.P220 21.08,36.32 21.08,39.88 RFE.20 21.08,40.13 21.08,41.15 RFE.P20 | v56.64,20.07 56.64,16.76 U6.3
  Bottom 0.254: v56.64,20.07 56.39,20.32 35.81,20.32 30.73,25.4 26.16,25.4 20.57,30.99 20.57,35.81 15.75,35.81 15.24,36.32 15.24,38.86 19.81,38.86 20.83,39.88 RFE.20
SCL1
  Top 0.152: U4.18 58.93,28.19 56.9,28.19 56.9,21.34 54.1,18.54 54.1,16.76 U6.5
SCL3  (via drill 0.33)
  Top 0.152: v29.21,47.5 29.21,48.01 26.92,48.01 U2.2 | v23.37,46.48 22.1,47.75 22.1,49.53 U5.6 21.84,49.78 21.84,51.56 U3.CLK | v19.81,33.53 R1.1 | v13.72,24.64 13.46,24.38 13.46,20.32 U1.P$1 13.46,20.07 13.46,13.21 v13.97,12.7 | v54.61,12.95 54.61,11.94 55.12,11.43 U6.13
  Bottom 0.152: v29.21,47.5 28.19,46.48 v23.37,46.48 22.1,45.21 16.51,45.21 11.94,40.64 11.94,33.53 v19.81,33.53 13.46,27.18 13.46,24.64 v13.72,24.64 | v54.61,12.95 54.36,12.7 v13.97,12.7
SDA0  (via drill 0.33)
  Top 0.254: RFE.P219 23.11,36.32 23.11,38.61 RFE.P19 23.11,38.86 23.11,39.88 RFE.19 | v57.91,18.29 57.91,16.76 U6.2 | v26.92,23.11 27.18,23.37 v27.18,35.05
  Bottom 0.254: v57.91,18.29 56.9,19.3 36.07,19.3 32.26,23.11 v26.92,23.11 | v27.18,35.05 23.11,39.12 23.11,39.88 RFE.19
SDA1  (via drill 0.33)
  Top 0.152: v57.66,27.43 58.93,27.43 U4.19 | v56.13,25.91 53.85,23.62 53.85,18.8 52.83,17.78 52.83,16.76 U6.6
  Bottom 0.152: v56.13,25.91 v57.66,27.43
SDA3  (via drill 0.33)
  Top 0.152: 25.91,34.8 23.37,34.8 R2.1 | 25.91,34.8 25.91,45.97 23.37,48.51 | 23.37,48.51 23.37,49.53 U5.5 | 23.37,48.51 26.67,48.51 U2.1 | 23.37,48.51 U5.5 | U3.DATA 23.11,51.56 23.11,49.78 U5.5 | v50.8,23.11 50.8,15.24 53.34,15.24 55.88,12.7 55.88,11.94 56.39,11.43 U6.14 | 25.91,34.8 v25.91,32.51 25.91,25.91 18.8,25.91 17.78,24.89 17.78,20.83 17.27,20.32 U1.P$4
  Bottom 0.152: v50.8,23.11 50.29,23.62 34.8,23.62 v25.91,32.51
TX0  (via drill 0.33)
  Top 0.254: v28.45,13.97 28.45,14.99 28.19,15.24 28.19,23.37 29.46,23.37 U8.14
  Bottom 0.254: v28.45,13.97 13.72,13.97 11.94,12.19 11.94,5.08 17.78,5.08 RXTXG.2
TX1  (via drill 0.33)
  Top 0.152: RFE.P205 21.08,12.19 21.08,10.16 RFE.P5 21.08,9.91 21.08,8.89 RFE.5 | v57.15,9.65 57.15,18.54 57.4,18.8 57.4,26.67 58.93,26.67 U4.20
  Bottom 0.152: v57.15,9.65 56.9,9.91 28.7,9.91 27.94,9.14 27.94,7.62 22.1,7.62 21.08,8.64 RFE.5
TXO
  Top 0.152: RFE.P210 30.99,12.19 30.99,8.89 RFE.10 30.99,8.64 30.99,7.62 RFE.P10 30.99,7.37 30.99,6.35 35.56,6.35 36.07,6.86 36.07,12.45 34.54,13.97 34.54,19.81 39.88,19.81 40.39,20.32 40.39,25.4 35.05,25.4 35.05,29.21 28.45,29.21 28.45,27.43 29.46,27.43 U8.11
  Bottom 0.152: FTDI.2 52.07,7.62 32,7.62 30.99,8.64 RFE.10
UD_N
  Top 0.254: R7.2 65.79,39.62 67.06,38.35 67.06,35.05 U4.3
UD_P
  Top 0.254: R6.2 63.75,39.62 66.29,37.08 66.29,35.05 U4.4
UDM_N
  Top 0.254: R7.1 65.53,41.66 65.28,41.91 65.28,46.48 X1.D-
UDM_P
  Top 0.254: X1.D+ 64.26,42.16 63.75,41.66 R6.1
VBUS  (via drill 0.33)
  Top 0.254: R5.1 37.08,44.96 37.85,44.96 R5.2 38.1,44.96 38.61,44.96 R5.3 38.86,44.96 39.62,44.96 R5.4 39.88,44.7 41.4,43.18 v41.4,40.89 | v64.01,36.32 64.01,35.05 U4.7 | v68.58,39.12 69.85,40.39 PTC1.1
  Bottom 0.254: v68.58,39.12 66.8,39.12 v64.01,36.32 63.25,35.56 46.74,35.56 v41.4,40.89
VBUSRAW
  Top 0.254: PTC1.2 69.85,43.43 66.04,43.43 66.04,46.48 X1.VBUS
VCC3  (via drill 0.33)
  Top 0.254: U2.8 30.99,48.51 26.16,53.34 23.11,53.34 U3.VDD 23.11,53.59 23.11,54.1 22.86,54.36 19.56,54.36 19.56,49.78 U5.8 19.3,49.53 19.3,48.26 17.53,46.48 C3.2 17.53,46.23 17.53,44.45 | U1.P$20 13.46,28.45 13.46,31.5 14.73,32.77 R3.2 14.99,33.02 16,34.04 19.05,34.04 | 17.53,44.45 C4.2 17.53,44.45 | R1.2 R2.2 | R1.2 | R1.2 19.05,32.77 19.05,34.04 | 19.05,34.04 19.05,36.07 RFE.P221 19.05,36.32 19.05,38.61 RFE.P21 19.05,38.86 19.05,39.88 RFE.21 18.8,40.13 18.8,43.18 17.53,44.45 | 70.61,24.64 73.66,24.64 | 70.61,24.64 70.61,25.15 U4.34 | 73.66,24.64 C14.1 73.66,24.64 | 73.66,33.78 70.61,33.78 70.61,33.27 U4.44 70.36,33.27 69.09,33.27 68.07,34.29 68.07,34.8 U4.2 | 73.66,33.78 C16.1 | 73.66,24.64 74.93,24.64 74.93,32.51 73.66,33.78 | 73.66,33.78 C16.1 | U$2.1 73.66,46.99 73.66,34.04 C16.1 | v44.45,40.89 43.18,40.89 R8.2 | J1.2 56.64,40.64 56.64,33.53 55.88,32.77 C13.1 55.88,32.51 55.88,31.75 58.93,31.75 U4.14 59.18,31.5 61.47,31.5 61.47,23.62 U4.24 61.72,23.37 61.72,20.32 | 29.72,17.78 29.72,20.83 U8.16 | 29.72,17.78 C23.1 29.72,17.78 | VR1.3 38.1,10.92 38.1,13.46 C2.1 37.85,13.46 37.85,13.97 v35.31,16.51 | v30.48,17.78 29.72,17.78 | 61.72,20.32 C15.1 | C15.1 61.98,20.32 67.56,20.32 R13.2 67.82,20.32 67.82,19.3 70.1,19.3 70.36,19.56 70.36,24.38 70.61,24.64 | 61.72,20.32 v61.72,16.51 61.72,13.97 59.18,11.43 U6.16 58.93,11.18 58.93,8.89 55.88,8.89 FTDI.4 | 61.72,20.32 C15.1
  Bottom 0.254: J1.2 56.64,40.64 55.37,39.37 45.97,39.37 v44.45,40.89 43.69,41.66 20.57,41.66 19.05,40.13 RFE.21 | v30.48,17.78 31.75,16.51 v35.31,16.51 v61.72,16.51
VCC5
  Top 0.508: C1.1 45.72,11.18 43.18,11.18 43.18,10.92 VR1.1 43.18,10.67 43.94,9.91 43.94,3.05 45.47,1.52 65.79,1.52 65.79,3.81 | 65.79,3.81 65.79,5.84 IC1.OUT | U$2.2 88.65,44.7 88.65,15.49 76.96,3.81 65.79,3.81
VCC12
  Top 0.508: IC1.IN 70.87,6.1 70.87,12.45 66.8,16.51 G1.+ 66.8,16.76 66.8,17.78 74.93,17.78 U$2.17
XTAL_N
  Top 0.152: 52.58,26.67 49.53,26.67 C9.2 | 52.58,26.67 52.58,26.16 NX5032GA.P$2 52.58,26.67 | 52.58,26.67 54.1,28.19 54.1,29.21 58.93,29.21 U4.17
XTAL_P
  Top 0.152: C8.2 49.53,29.21 52.58,29.21 52.58,29.72 NX5032GA.P$1 52.58,29.97 58.93,29.97 U4.16

## Text on the board
tPlace: V5 | V3.3 | 2 | A5 | A4 | 5 | 6 | A3 | A2 | 9 | 10 | A1 | 13 | A0 | 14 | D5 | D6 | V12 | GND | SNARF Base / EnvioSYS | = | GND | CTS | Vcc | RXI | TXO
bPlace: EnvioSYS | 4.b 20140103 | (c) Copyright 2013-2014 J.C. Woltz